# EAGLE board CT_schematic (EAGLE 7.6.0)

Size 100 x 80 mm. Coordinates in mm from the lower left corner, seen from the top.
Outline: 0,0 100,0 100,80 0,80 0,0
Copper layers (1*16): Top 0.035mm / dielectric 1.5mm / Bottom 0.035mm
Design rules "default": minimum track width 10mil, minimum drill 24mil, track to track 8mil, track to pad 8mil, pad to pad 8mil, via to via 8mil, smd to smd 8mil, copper to edge 40mil, drill to drill 8mil, minimum pad ring 10mil, minimum via ring 8mil, stop-mask expansion 4mil, vias tented up to drill 0mil, thermal gap 10mil

## Footprints (pad centres in the part's own frame; a part is rotated, then mirrored left to right if it is on the bottom)
C0603 = smd 0.8 x 0.8: 1 -0.762,0; 2 0.762,0
C0402 = smd 0.5 x 0.5: 1 -0.508,0; 2 0.508,0
C0805 = smd 1.2 x 1.3: 1 -1.016,0; 2 1.016,0
C1206 = smd 1.3 x 1.6: 1 -1.524,0; 2 1.524,0
C1210 = smd 1.2 x 2.5: 1 -1.524,0; 2 1.524,0
EXV-9H = smd 3.505 x 1.676: 1 -2.857,0; 2 2.857,0
L0603 = smd 0.8 x 0.8: 1 -0.762,0; 2 0.762,0
L1210 = smd 1.2 x 2.5: 1 -1.524,0; 2 1.524,0
PJ-037B_PACKAGE = drill 3.7 square: 1 12,0 | drill 3.2 square: 2 6,0
R0603 = smd 0.8 x 0.8: 1 -0.762,0; 2 0.762,0
TFBGA64 = smd 0.35 x 0.35: A1 -1.75,1.75; A2 -1.25,1.75; A3 -0.75,1.75; A4 -0.25,1.75; A5 0.25,1.75; A6 0.75,1.75; A7 1.25,1.75; A8 1.75,1.75; B1 -1.75,1.25; B2 -1.25,1.25; B3 -0.75,1.25; B4 -0.25,1.25; B5 0.25,1.25; B6 0.75,1.25; B7 1.25,1.25; B8 1.75,1.25; C1 -1.75,0.75; C2 -1.25,0.75; C3 -0.75,0.75; C4 -0.25,0.75; C5 0.25,0.75; C6 0.75,0.75; C7 1.25,0.75; C8 1.75,0.75; D1 -1.75,0.25; D2 -1.25,0.25; D3 -0.75,0.25; D4 -0.25,0.25; D5 0.25,0.25; D6 0.75,0.25; D7 1.25,0.25; D8 1.75,0.25; E1 -1.75,-0.25; E2 -1.25,-0.25; E3 -0.75,-0.25; E4 -0.25,-0.25; E5 0.25,-0.25; E6 0.75,-0.25; E7 1.25,-0.25; E8 1.75,-0.25; F1 -1.75,-0.75; F2 -1.25,-0.75; F3 -0.75,-0.75; F4 -0.25,-0.75; F5 0.25,-0.75; F6 0.75,-0.75; F7 1.25,-0.75; F8 1.75,-0.75; G1 -1.75,-1.25; G2 -1.25,-1.25; G3 -0.75,-1.25; G4 -0.25,-1.25; G5 0.25,-1.25; G6 0.75,-1.25; G7 1.25,-1.25; G8 1.75,-1.25; H1 -1.75,-1.75; H2 -1.25,-1.75; H3 -0.75,-1.75; H4 -0.25,-1.75; H5 0.25,-1.75; H6 0.75,-1.75; H7 1.25,-1.75; H8 1.75,-1.75
SOIC-8 = smd 1.6 x 0.6: 1 -2.7,1.905 | smd 1.55 x 0.6: 2 -2.7,0.635; 3 -2.7,-0.635; 4 -2.7,-1.905; 5 2.7,-1.905; 6 2.7,-0.635; 7 2.7,0.635; 8 2.7,1.905
SSOP-28 = smd 1.5 x 0.4: 1 -3.625,4.225; 2 -3.625,3.575; 3 -3.625,2.925; 4 -3.625,2.275; 5 -3.625,1.625; 6 -3.625,0.975; 7 -3.625,0.325; 8 -3.625,-0.325; 9 -3.625,-0.975; 10 -3.625,-1.625; 11 -3.625,-2.275; 12 -3.625,-2.925; 13 -3.625,-3.575; 14 -3.625,-4.225; 15 3.625,-4.225; 16 3.625,-3.575; 17 3.625,-2.925; 18 3.625,-2.275; 19 3.625,-1.625; 20 3.625,-0.975; 21 3.625,-0.325; 22 3.625,0.325; 23 3.625,0.975; 24 3.625,1.625; 25 3.625,2.275; 26 3.625,2.925; 27 3.625,3.575; 28 3.625,4.225
FCI_10118193-0001LF = smd 0.4 x 1.35: 1 -1.3,2.675; 2 -0.65,2.675; 3 0,2.675; 4 0.65,2.675; 5 1.3,2.675 | smd 1.6 x 1.4: 6 -3.2,2.45; 7 3.2,2.45 | smd 1.9 x 1.9: 8 -1.2,0; 9 1.2,0 | hole 0.5: -3.3,0; 3.3,0
SSOP-20 = smd 1.651 x 0.432: 1 -3.48,2.925; 2 -3.48,2.275; 3 -3.48,1.625; 4 -3.48,0.975; 5 -3.48,0.325; 6 -3.48,-0.325; 7 -3.48,-0.975; 8 -3.48,-1.625; 9 -3.48,-2.275; 10 -3.48,-2.925; 11 3.48,-2.925; 12 3.48,-2.275; 13 3.48,-1.625; 14 3.48,-0.975; 15 3.48,-0.325; 16 3.48,0.325; 17 3.48,0.975; 18 3.48,1.625; 19 3.48,2.275; 20 3.48,2.925
182-009-MALE = drill 1.194 pad 1.524 octagon: 1 -5.537,10.923; 2 -2.769,10.923; 3 0,10.923; 4 2.769,10.923; 5 5.537,10.923; 6 -4.153,8.08; 7 -1.384,8.08; 8 1.384,8.08; 9 4.153,8.08 | hole 3.048: -12.446,9.501; 12.446,9.501
ABLS-12.000MHZ-B4-T = smd 5.6 x 2.8: 1 0,0; 2 9.5,0
ASEK = smd 1.4 x 1: 1 -1.1,-0.8; 2 1.1,-0.8; 3 1.1,0.8; 4 -1.1,0.8
ASFL1 = smd 1.7 x 1.5: 1 -1.27,-1.1; 2 1.27,-1.1; 3 1.27,1.1; 4 -1.27,1.1
WSON-8 = smd 0.3 x 0.6: 1 -0.75,0; 2 0.05,0; 3 0.85,0; 4 1.65,0; 5 1.65,3.8; 6 0.85,3.8; 7 0.05,3.8; 8 -0.75,3.8 | smd 3 x 2.6: PAD 0.45,1.9
SON-6 = smd 0.55 x 0.3: 1 -0.355,0.5 | smd 0.52 x 0.3: 2 -0.37,0; 3 -0.37,-0.5; 4 0.37,-0.5; 5 0.37,0; 6 0.37,0.5
SW_4-1437565-2 = smd 1.4 x 2.1: 1 -2.23,4.55; 2 -2.23,-4.55; 3 2.23,4.55; 4 2.23,-4.55
LGM67K-G1J2-24-Z = smd 0.8 x 1.4: A -2,0; C 0,0
NC7SZ125M5X = smd 1.3 x 0.7: 1 -1.3,0.95; 2 -1.3,0; 3 -1.3,-0.95; 4 1.3,-0.95; 5 1.3,0.95

## Placement (x,y rotation side)
C1  1e-06  [C0603]  -58.42,72.39 0 top  (outside the outline)
C2  1e-07  [C0603]  -62.23,72.39 0 top  (outside the outline)
C3  1e-07  [C0603]  -66.04,72.39 0 top  (outside the outline)
C4  1e-07  [C0603]  -69.85,72.39 0 top  (outside the outline)
C5  1e-07  [C0603]  -73.66,72.39 0 top  (outside the outline)
C6  1e-07  [C0603]  -15.24,77.47 0 top  (outside the outline)
C7  4.7e-06  [C0603]  -54.61,72.39 0 top  (outside the outline)
C8  1e-08  [C0603]  -19.05,77.47 0 top  (outside the outline)
C9  1e-08  [C0603]  -22.86,77.47 0 top  (outside the outline)
C10  1e-06  [C0603]  -26.67,77.47 0 top  (outside the outline)
C11  1e-08  [C0402]  -68.58,77.47 0 top  (outside the outline)
C12  1e-08  [C0402]  -72.39,77.47 0 top  (outside the outline)
C13  1e-07  [C0402]  -76.2,77.47 0 top  (outside the outline)
C14  4.7e-06  [C0805]  -21.59,66.04 0 top  (outside the outline)
C15  1e-07  [C0402]  -15.24,82.55 0 top  (outside the outline)
C16  1e-07  [C0402]  -19.05,82.55 0 top  (outside the outline)
C17  1e-06  [C0603]  -30.48,77.47 0 top  (outside the outline)
C18  1e-06  [C0603]  -34.29,77.47 0 top  (outside the outline)
C19  1e-06  [C0603]  -38.1,77.47 0 top  (outside the outline)
C20  4.7e-06  [C0805]  -26.67,66.04 0 top  (outside the outline)
C21  1e-08  [C0402]  -22.86,82.55 0 top  (outside the outline)
C22  1e-08  [C0402]  -26.67,82.55 0 top  (outside the outline)
C23  1e-08  [C0402]  -30.48,82.55 0 top  (outside the outline)
C24  1e-05  [C1206]  -71.12,58.42 0 top  (outside the outline)
C25  1e-05  [C1210]  -58.42,58.42 0 top  (outside the outline)
C26  1e-07  [C0402]  -34.29,82.55 0 top  (outside the outline)
C27  0.0001  [EXV-9H]  -66.04,49.53 0 top  (outside the outline)
C28  0.0001  [EXV-9H]  -17.78,59.69 0 top  (outside the outline)
C29  1e-08  [C0402]  -38.1,82.55 0 top  (outside the outline)
F1  240.0  [L0603]  -41.91,77.47 0 top  (outside the outline)
I1  1.5e-05  [L1210]  -64.77,58.42 0 top  (outside the outline)
J1  PJ-037B  [PJ-037B_PACKAGE]  -27.94,29.21 0 top  (outside the outline)
R2  1000.0  [R0603]  -45.72,77.47 0 top  (outside the outline)
R4  4700.0  [R0603]  -49.53,77.47 0 top  (outside the outline)
R5  10000.0  [R0603]  -62.23,66.04 0 top  (outside the outline)
R6  10000.0  [R0603]  -67.31,66.04 0 top  (outside the outline)
R7  10000.0  [R0603]  -72.39,66.04 0 top  (outside the outline)
R8  10000.0  [R0603]  -15.24,72.39 0 top  (outside the outline)
R9  10000.0  [R0603]  -20.32,72.39 0 top  (outside the outline)
R10  10000.0  [R0603]  -25.4,72.39 0 top  (outside the outline)
R11  10000.0  [R0603]  -30.48,72.39 0 top  (outside the outline)
R12  4700.0  [R0603]  -53.34,77.47 0 top  (outside the outline)
R13  10000.0  [R0603]  -35.56,72.39 0 top  (outside the outline)
R14  10000.0  [R0603]  -40.64,72.39 0 top  (outside the outline)
R15  100000.0  [R0603]  -31.75,66.04 0 top  (outside the outline)
R16  100000.0  [R0603]  -36.83,66.04 0 top  (outside the outline)
R17  100000.0  [R0603]  -41.91,66.04 0 top  (outside the outline)
R18  100000.0  [R0603]  -46.99,66.04 0 top  (outside the outline)
R19  2231.0  [R0603]  -57.15,77.47 0 top  (outside the outline)
R20  1000.0  [R0603]  -60.96,77.47 0 top  (outside the outline)
R21  10000.0  [R0603]  -45.72,72.39 0 top  (outside the outline)
R22  10000.0  [R0603]  -50.8,72.39 0 top  (outside the outline)
R23  9100.0  [R0603]  -64.77,77.47 0 top  (outside the outline)
R24  680000.0  [R0603]  -52.07,66.04 0 top  (outside the outline)
R25  120000.0  [R0603]  -57.15,66.04 0 top  (outside the outline)
U1  STM32F101RBH6  [TFBGA64]  -60.96,26.67 0 top  (outside the outline)
U2  AT25010B-SSHL-T  [SOIC-8]  -24.13,40.64 0 top  (outside the outline)
U3  AT25M01-SSHM-T  [SOIC-8]  -40.64,40.64 0 top  (outside the outline)
U4  FT232RL-REEL  [SSOP-28]  -60.96,7.62 0 top  (outside the outline)
U5  10118193-0001LF  [FCI_10118193-0001LF]  -35.56,49.53 0 top  (outside the outline)
U6  MAX3218EAP+T  [SSOP-20]  -50.8,40.64 0 top  (outside the outline)
U7  182-009-113R531  [182-009-MALE]  -36.83,6.35 0 top  (outside the outline)
U8  ABLS-12.000MHZ-B4-T  [ABLS-12.000MHZ-B4-T]  -39.37,59.69 0 top  (outside the outline)
U9  ASEK-32.768KHz-ECST  [ASEK]  -57.15,49.53 0 top  (outside the outline)
U10  ASFL1-25MHZ-NCS  [ASFL1]  -26.67,50.8 0 top  (outside the outline)
U11  LP3878SDX-ADJ/NOPB  [WSON-8]  -73.66,39.37 0 top  (outside the outline)
U12  TPS3895ADRYR  [SON-6]  -40.64,81.28 0 top  (outside the outline)
U13  4-1437565-2  [SW_4-1437565-2]  -44.45,27.94 0 top  (outside the outline)
U14  Q65110A2395  [LGM67K-G1J2-24-Z]  -46.99,58.42 0 top  (outside the outline)
U15  nc7sz125m5x  [NC7SZ125M5X]  -15.24,66.04 0 top  (outside the outline)

## Library data of the parts
C1-C29 F1 I1 J1 R2 R4-R25 U1-U15 = circuit_tree

## Nets
CLK_CRYSTAL_U4_27: U4.27 U8.1
CLK_CRYSTAL_U4_28: U4.28 U8.2
CLK_U1_A1: U1.A1 U9.3
CLK_U1_C1: U1.C1 U10.3
GND: C1.2 C2.2 C3.2 C4.2 C5.2 C6.2 C7.2 C8.2 C9.2 C10.2 C11.2 C12.2 C13.2 C14.2 C15.2 C16.2 C17.2 C18.2 C19.2 C21.2 C22.2 C23.2 C24.2 C25.2 C26.2 C27.2 C28.2 C29.2 J1.2 R2.2 R5.2 R14.2 R20.2 R23.2 R25.2 U1.C2 U1.D4 U1.D5 U1.D6 U1.F1 U2.4 U3.4 U4.7 U4.18 U4.21 U4.25 U4.26 U5.5 U5.6 U5.7 U5.8 U5.9 U6.5 U6.17 U6.20 U7.5 U9.2 U10.2 U11.3 U11.PAD U12.2 U14.C U15.1 U15.3
NET_U1_B4: R5.1 U1.B4
NET_U1_E1: R4.1 U1.E1 U15.4
NET_U1_H1: C8.1 C9.1 C10.1 F1.1 U1.G1 U1.H1
NET_U1_H6: U14.A
NET_U1_H7: U13.3 U13.4
NET_U2_3: R6.1 U2.3
NET_U2_7: R8.1 U2.7
NET_U3_3: R9.1 U3.3
NET_U3_7: R11.1 U3.7
NET_U4_14: R13.1 U4.14
NET_U4_17: C15.1 U4.17
NET_U4_19: R14.1 U4.19
NET_U5_1: R12.1 U5.1
NET_U5_2: U4.16 U5.2
NET_U5_3: U4.15 U5.3
NET_U5_19: R12.2
NET_U6_1: I1.1 U6.1
NET_U6_2: R15.1 U6.2
NET_U6_3: R16.1 U6.3
NET_U6_4: R17.1 U6.4
NET_U6_15: C19.1 U6.15
NET_U6_16: C20.2 U6.16
NET_U6_18: C20.1 U6.18
NET_U6_19: C18.1 U6.19
NET_U7_2: U6.12 U7.2
NET_U7_3: U6.14 U7.3
NET_U7_7: U6.11 U7.7
NET_U7_8: U6.13 U7.8
NET_U11_1: C23.1 U11.1
NET_U11_6: R19.2 R20.1 U11.6
NET_U11_8: R18.1 U11.8
NET_U12_1: R22.1 R23.1 U12.1
NET_U12_3: R24.2 R25.1 U12.3
NET_U12_4: R21.1 U12.4 U15.2
NET_U13_1: R2.1 U13.1 U13.2
PROC_SPI1_MISO: U1.A4 U3.2
PROC_SPI1_MOSI: U1.C4 U3.5
PROC_SPI1_NSS: R10.1 U1.A6 U3.1
PROC_SPI1_SCK: U1.A5 U3.6
PROC_SPI2_MISO: U1.F8 U2.2
PROC_SPI2_MOSI: U1.F7 U2.5
PROC_SPI2_NSS: R7.1 U1.H8 U2.1
PROC_SPI2_SCK: U1.G8 U2.6
PROC_USART1_CTS: U1.C8 U6.8
PROC_USART1_RX: U1.C3 U6.9
PROC_USART1_TX: U1.C7 U6.7
PROC_USART2_CTS: U1.G2 U4.3
PROC_USART2_RTS: U1.H2 U4.11
PROC_USART2_RX: U1.G3 U4.1
PROC_USART2_TX: U1.F3 U4.5
VCC_S1_7V2: C24.1 C27.1 C28.1 J1.1 R18.2 U11.4
VCC_TIER1_3V3: C1.1 C2.1 C3.1 C4.1 C5.1 C6.1 C7.1 C11.1 C12.1 C13.1 C14.1 C16.1 C17.1 C21.1 C22.1 C25.1 C26.1 C29.1 F1.2 I1.2 R4.2 R6.2 R7.2 R8.2 R9.2 R10.2 R11.2 R13.2 R15.2 R16.2 R17.2 R19.1 R21.2 R22.2 R24.1 U1.B2 U1.D2 U1.E4 U1.E5 U1.E6 U2.8 U3.8 U4.4 U4.20 U6.6 U9.4 U10.4 U11.5 U12.6 U15.5

## Tracks (layer width: path | path; a pad name or v marks a point on that pad's centre or on a via)
CLK_CRYSTAL_U4_27  (1 unrouted)
CLK_CRYSTAL_U4_28  (1 unrouted)
CLK_U1_A1  (1 unrouted)
CLK_U1_C1  (1 unrouted)
GND  (63 unrouted)
NET_U1_B4  (1 unrouted)
NET_U1_E1  (2 unrouted)
NET_U1_H1  (5 unrouted)
NET_U1_H7  (1 unrouted)
NET_U2_3  (1 unrouted)
NET_U2_7  (1 unrouted)
NET_U3_3  (1 unrouted)
NET_U3_7  (1 unrouted)
NET_U4_14  (1 unrouted)
NET_U4_17  (1 unrouted)
NET_U4_19  (1 unrouted)
NET_U5_1  (1 unrouted)
NET_U5_2  (1 unrouted)
NET_U5_3  (1 unrouted)
NET_U6_1  (1 unrouted)
NET_U6_2  (1 unrouted)
NET_U6_3  (1 unrouted)
NET_U6_4  (1 unrouted)
NET_U6_15  (1 unrouted)
NET_U6_16  (1 unrouted)
NET_U6_18  (1 unrouted)
NET_U6_19  (1 unrouted)
NET_U7_2  (1 unrouted)
NET_U7_3  (1 unrouted)
NET_U7_7  (1 unrouted)
NET_U7_8  (1 unrouted)
NET_U11_1  (1 unrouted)
NET_U11_6  (2 unrouted)
NET_U11_8  (1 unrouted)
NET_U12_1  (2 unrouted)
NET_U12_3  (2 unrouted)
NET_U12_4  (2 unrouted)
NET_U13_1  (2 unrouted)
PROC_SPI1_MISO  (1 unrouted)
PROC_SPI1_MOSI  (1 unrouted)
PROC_SPI1_NSS  (2 unrouted)
PROC_SPI1_SCK  (1 unrouted)
PROC_SPI2_MISO  (1 unrouted)
PROC_SPI2_MOSI  (1 unrouted)
PROC_SPI2_NSS  (2 unrouted)
PROC_SPI2_SCK  (1 unrouted)
PROC_USART1_CTS  (1 unrouted)
PROC_USART1_RX  (1 unrouted)
PROC_USART1_TX  (1 unrouted)
PROC_USART2_CTS  (1 unrouted)
PROC_USART2_RTS  (1 unrouted)
PROC_USART2_RX  (1 unrouted)
PROC_USART2_TX  (1 unrouted)
VCC_S1_7V2  (5 unrouted)
VCC_TIER1_3V3  (49 unrouted)